# EAGLE board MainBoard (EAGLE 7.2.0)
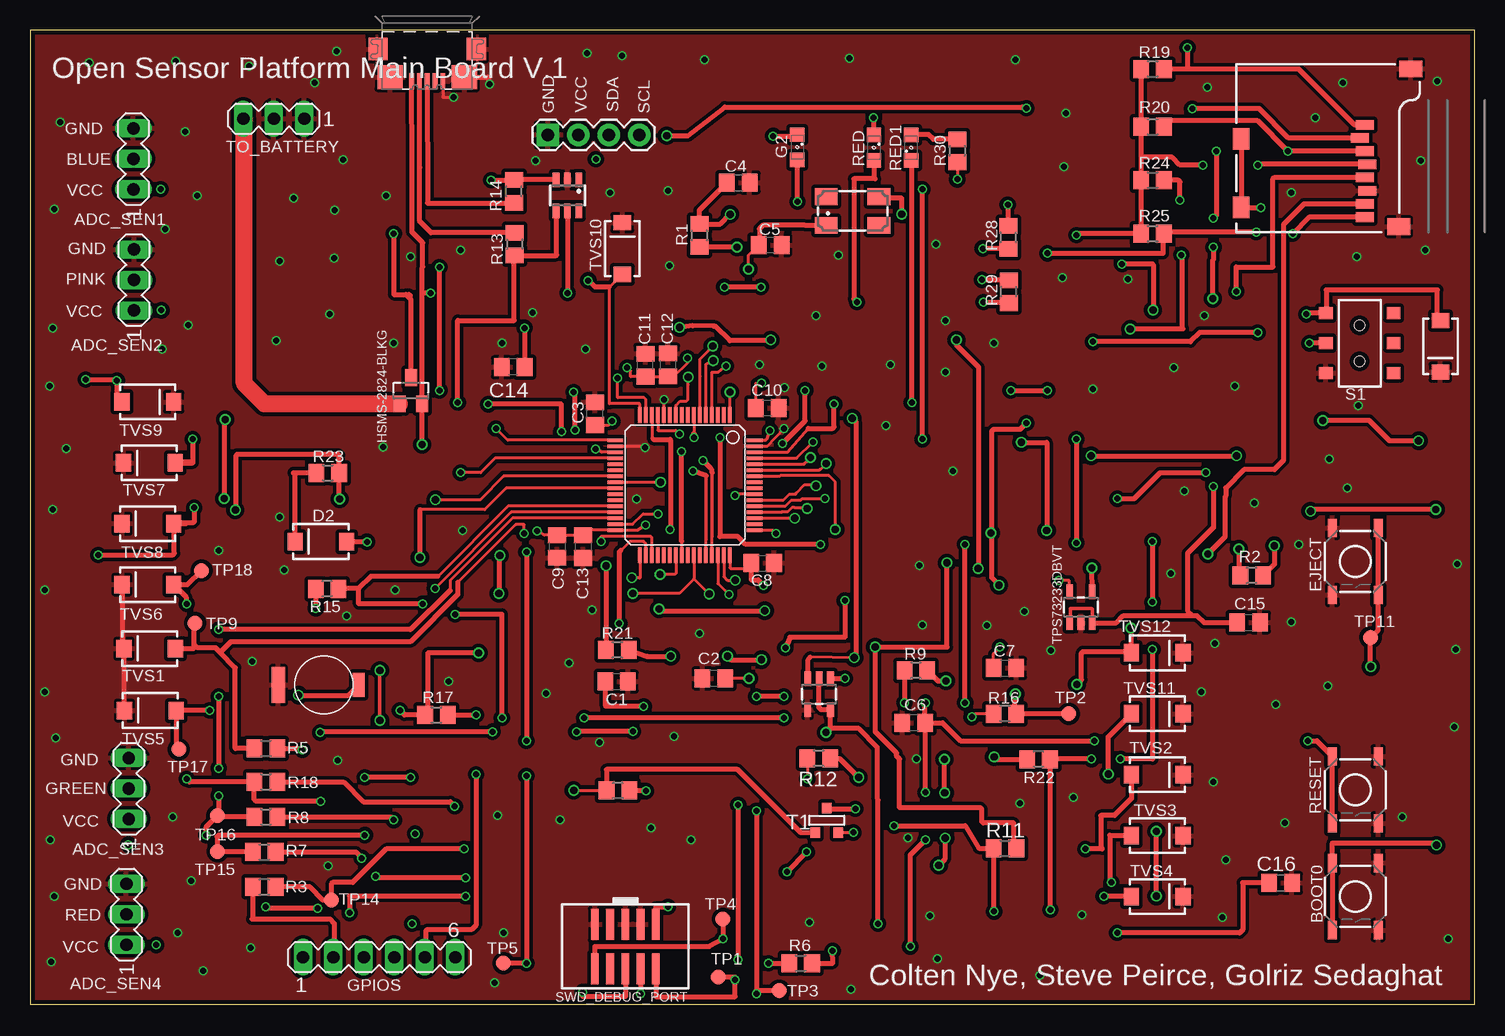
[diagram p0: board, top side]
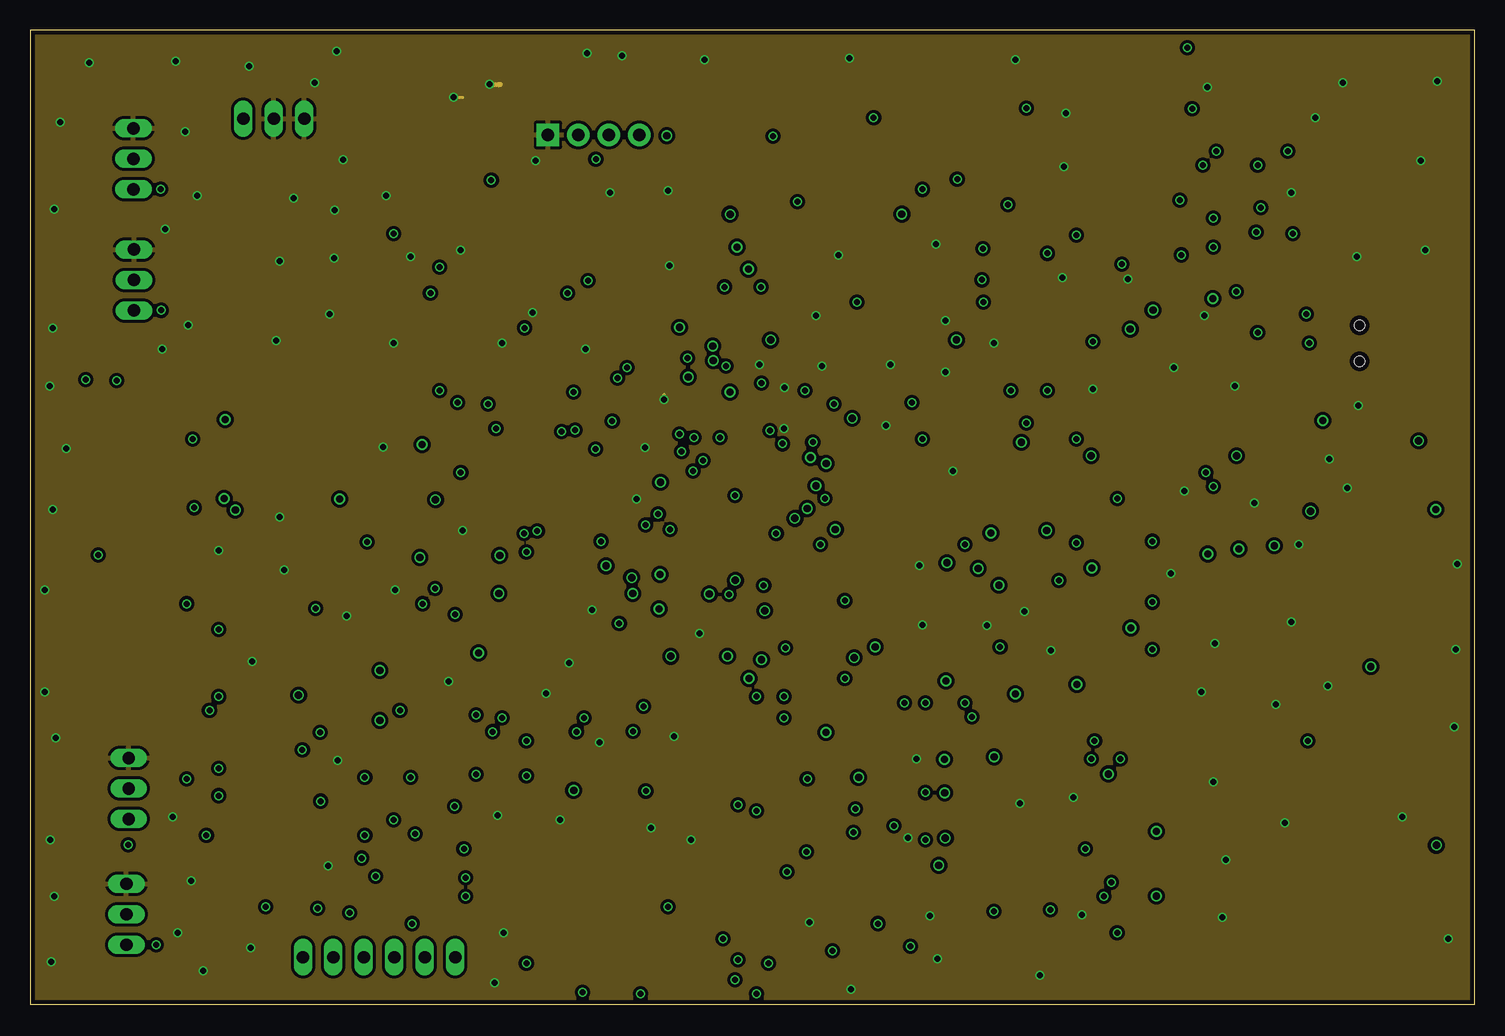
[diagram p1: board, inner layer GND]
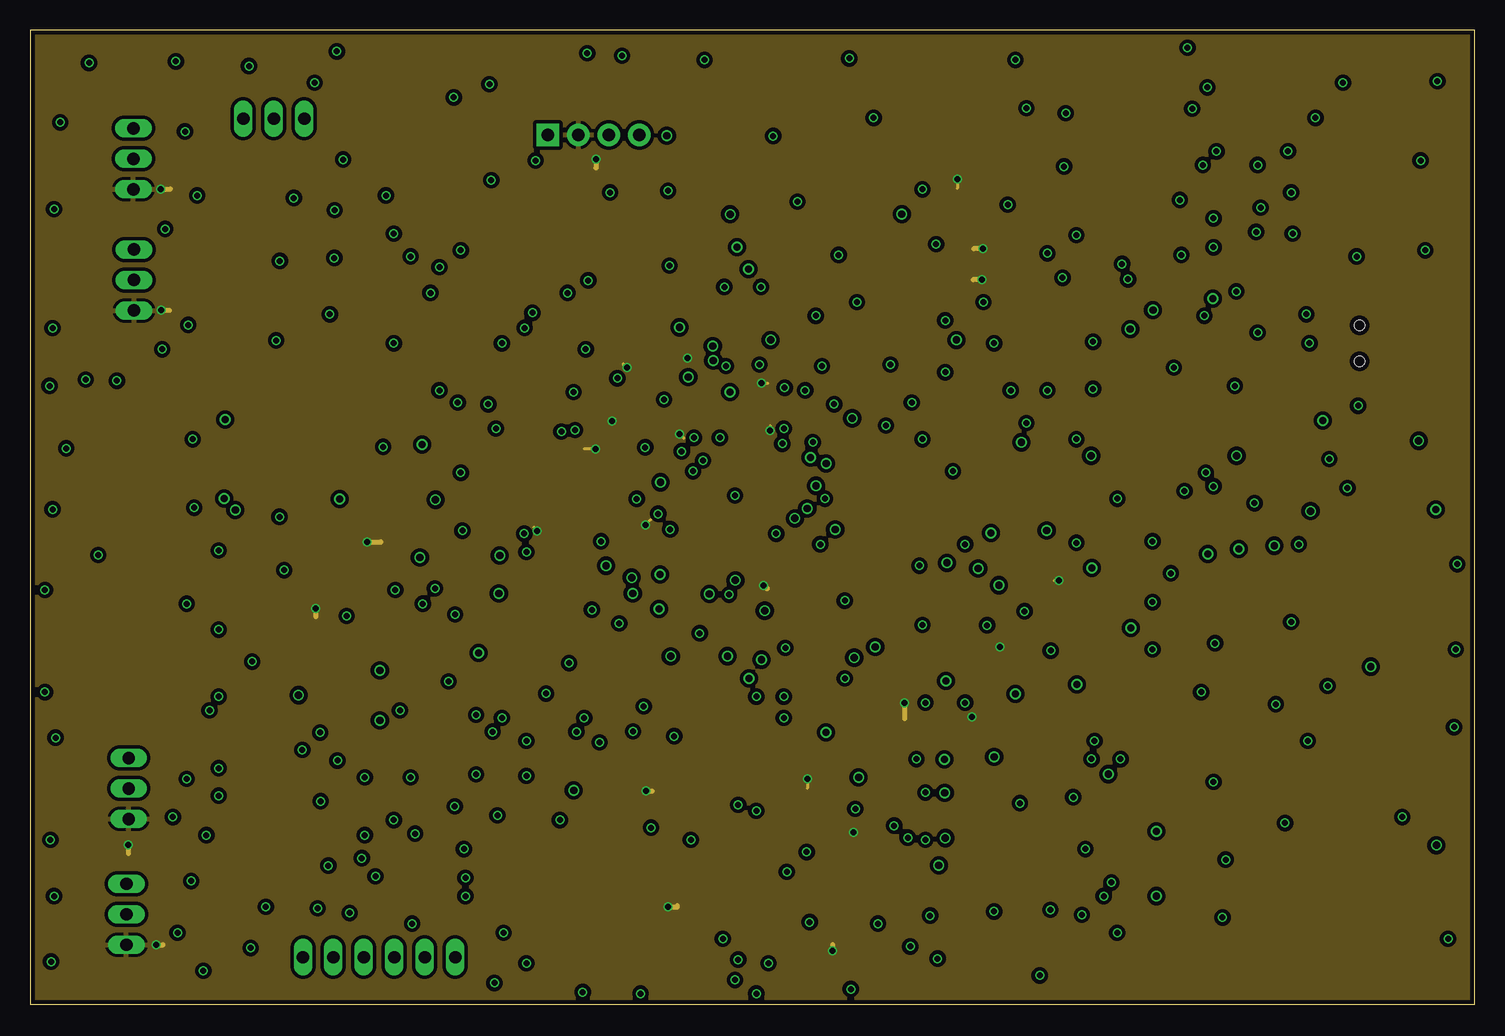
[diagram p2: board, inner layer +3V3]
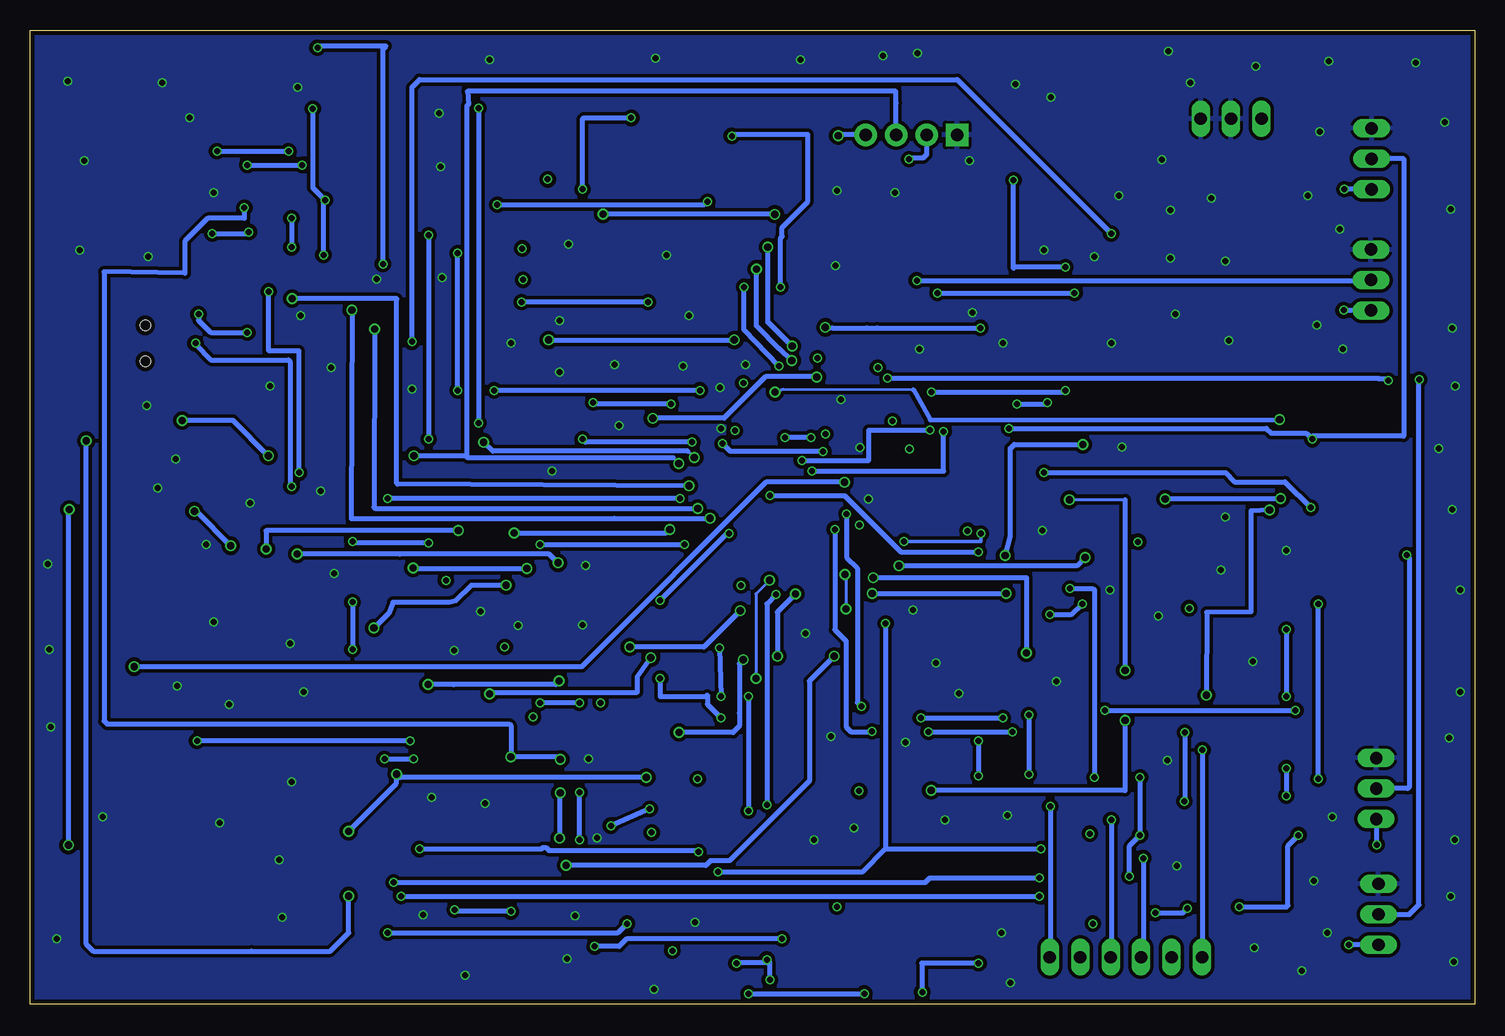
[diagram p3: board, bottom side, seen from below]

Size 120.45 x 81.23 mm. Coordinates in mm from the lower left corner, seen from the top.
Outline: 0,0 120.45,0.01 120.45,81.23 0.01,81.22 0,0
Copper layers (1*2*15*16): Top 0.035559375mm / dielectric 0.17018125mm / GND 0.01778125mm / dielectric 47mil / +3V3 0.01778125mm / dielectric 0.17018125mm / Bottom 0.035559375mm
Design rules "OSHPark-4layer": minimum track width 5mil, minimum drill 10mil, track to track 5mil, track to pad 5mil, pad to pad 5mil, via to via 5mil, smd to smd 5mil, copper to edge 15mil, drill to drill 6mil, minimum pad ring 4mil, minimum via ring 4mil, stop-mask expansion 4mil, vias tented up to drill 0mil, thermal gap 10mil

## Footprints (pad centres in the part's own frame; a part is rotated, then mirrored left to right if it is on the bottom)
CTS406 = smd 1.9 x 1.4: 1 -2.2,-1.2; 2 2.2,-1.2; 3 2.2,1.2; 4 -2.2,1.2
MA03-1 = drill 1.016 long: 1 -2.54,0; 2 0,0; 3 2.54,0
TACTILE-SWITCH-SMD = smd 1.524 x 0.762: 1 -2.794,1.905; 2 2.794,1.905; 3 -2.794,-1.905; 4 2.794,-1.905
C0805 = smd 1.3 x 1.5: 1 -0.95,0; 2 0.95,0
SOT23-5 = smd 0.55 x 1.2: 1 -0.95,-1.3; 2 0,-1.3; 3 0.95,-1.3; 4 0.95,1.3; 5 -0.95,1.3
SMA-DIODE = smd 1.27 x 1.47: A -2.15,0; C 2.15,0
SML0805 = smd 1.2 x 1.2: A 1.05,0; C -1.05,0
MA06-1 = drill 1.016 long: 1 -6.35,0; 2 -3.81,0; 3 -1.27,0; 4 1.27,0; 5 3.81,0; 6 6.35,0
SOT23 = smd 1 x 1.4: 1 -0.95,-1.1; 2 0.95,-1.1; 3 0,1.1
1X04 = drill 1.016 pad 1.88 square: 1 0,0 | drill 1.016 pad 1.88: 2 2.54,0; 3 5.08,0; 4 7.62,0
R0805 = smd 1.3 x 1.5: 1 -0.95,0; 2 0.95,0
SOT23-6 = smd 0.55 x 1.2: 1 -0.95,-1.3; 2 0,-1.3; 3 0.95,-1.3; 4 0.95,1.3; 5 0,1.3; 6 -0.95,1.3
AYZ0202 = smd 1 x 1.15: 1 -2.5,2.825; 2 0,2.825; 3 2.5,2.825; 4 -2.5,-2.825; 5 0,-2.825; 6 2.5,-2.825 | hole 0.85: 1.5,0; -1.5,0
414-VA5R = smd 1 x 2: + -2.9,0 | smd 1.1 x 3: - 3.8,0
2X05_1.27MM_SMT = smd 0.65 x 2.6: 1 -2.54,-1.85; 2 -2.54,1.85; 3 -1.27,-1.85; 4 -1.27,1.85; 5 0,-1.85; 6 0,1.85; 7 1.27,-1.85; 8 1.27,1.85; 9 2.54,-1.85; 10 2.54,1.85
SOT-23 = smd 0.787 x 0.889: 1 0.025,-1.016; 2 -0.94,1.016; 3 0.991,1.016
B1,27 = smd 1.27 x 1.27: TP 0,0
LQFP64 = smd 1.3 x 0.3: 1 -5.85,3.75; 2 -5.85,3.25; 3 -5.85,2.75; 4 -5.85,2.25; 5 -5.85,1.75; 6 -5.85,1.25; 7 -5.85,0.75; 8 -5.85,0.25; 9 -5.85,-0.25; 10 -5.85,-0.75; 11 -5.85,-1.25; 12 -5.85,-1.75; 13 -5.85,-2.25; 14 -5.85,-2.75; 15 -5.85,-3.25; 16 -5.85,-3.75; 33 5.85,-3.75; 34 5.85,-3.25; 35 5.85,-2.75; 36 5.85,-2.25; 37 5.85,-1.75; 38 5.85,-1.25; 39 5.85,-0.75; 40 5.85,-0.25; 41 5.85,0.25; 42 5.85,0.75; 43 5.85,1.25; 44 5.85,1.75; 45 5.85,2.25; 46 5.85,2.75; 47 5.85,3.25; 48 5.85,3.75 | smd 0.3 x 1.3: 17 -3.75,-5.8; 18 -3.25,-5.8; 19 -2.75,-5.8; 20 -2.25,-5.8; 21 -1.75,-5.8; 22 -1.25,-5.8; 23 -0.75,-5.8; 24 -0.25,-5.8; 25 0.25,-5.8; 26 0.75,-5.8; 27 1.25,-5.8; 28 1.75,-5.8; 29 2.25,-5.8; 30 2.75,-5.8; 31 3.25,-5.8; 32 3.75,-5.8; 49 3.75,5.8; 50 3.25,5.8; 51 2.75,5.8; 52 2.25,5.8; 53 1.75,5.8; 54 1.25,5.8; 55 0.75,5.8; 56 0.25,5.8; 57 -0.25,5.8; 58 -0.75,5.8; 59 -1.25,5.8; 60 -1.75,5.8; 61 -2.25,5.8; 62 -2.75,5.8; 63 -3.25,5.8; 64 -3.75,5.8
MICRO-SD-SOCKET-PP = smd 0.8 x 1.5: 1 -8.94,10.7; 2 -7.84,10.3; 3 -6.74,10.7; 4 -5.64,10.9; 5 -4.54,10.7; 6 -3.44,10.9; 7 -2.34,10.7; 8 -1.24,10.7 | smd 1.8 x 1.4: CD1 -2.05,0.4; CD2 -7.75,0.4 | smd 1.4 x 1.9: GND1 -13.6,14.55; GND3 -0.45,13.55
ZX62R-B-5P = smd 1.35 x 0.4: 1 2.675,-1.3; 2 2.675,-0.65; 3 2.675,0; 4 2.675,0.65; 5 2.675,1.3 | smd 1.9 x 1.6: M1 0,-4.1; M2 0,4.1 | smd 2 x 2.1: M3 2.35,3.1; M4 2.35,-3.1

## Placement (x,y rotation side)
406C35E  16meg  [CTS406]  68.57,66.13 0 top
ADC_SEN1  [MA03-1]  8.62,70.48 90 top
ADC_SEN2  [MA03-1]  8.67,60.39 90 top
ADC_SEN3  [MA03-1]  8.23,17.98 90 top
ADC_SEN4  [MA03-1]  8.04,7.49 90 top
BOOT0  Boot0  [TACTILE-SWITCH-SMD]  110.48,8.98 270 top
C1  2.2u  [C0805]  48.9,26.91 0 top
C2  2.2u  [C0805]  57.01,27.18 180 top
C3  100n  [C0805]  47.1,49.24 90 top
C4  22p  [C0805]  59.05,68.5 0 top
C5  22p  [C0805]  61.71,63.31 0 top
C6  0.1u  [C0805]  73.67,23.46 180 top
C7  10u  [C0805]  81.27,28.03 0 top
C8  100n  [C0805]  61.07,36.77 0 top
C9  100n  [C0805]  43.93,38.17 270 top
C10  100n  [C0805]  61.46,49.73 0 top
C11  100n  [C0805]  51.3,53.28 90 top
C12  1u  [C0805]  53.2,53.3 90 top
C13  10u  [C0805]  46.09,38.16 270 top
C14  0.01u  [C0805]  40.28,53.12 180 top
C15  1u  [C0805]  101.59,31.84 0 top
C16  4.7u  [C0805]  104.26,10.12 0 top
CURRENT_LIMITER  STMPS2141STR  [SOT23-5]  65.78,25.85 180 top
D2  [SMA-DIODE]  24.25,38.57 180 top
EJECT  Eject  [TACTILE-SWITCH-SMD]  110.48,36.92 270 top
G2  [SML0805]  63.97,71.45 270 top
GPIOS  [MA06-1]  29.1,3.93 0 top
HSMS-2824-BLKG  Schottky  [SOT23]  31.75,51.16 0 top
JP1  I2C Sensor  [1X04]  43.17,72.48 0 top
R1  904.3  [R0805]  55.8,64.1 270 top
R2  10k  [R0805]  101.84,35.75 180 top
R3  10k  [R0805]  19.53,9.77 180 top
R5  10k  [R0805]  19.66,21.33 0 top
R6  100k  [R0805]  64.24,3.42 0 top
R7  10k  [R0805]  19.53,12.69 0 top
R8  10k  [R0805]  19.66,15.62 0 top
R9  4.7k  [R0805]  73.85,27.84 180 top
R10  10k  [R0805]  49.01,17.82 180 top
R11  47k  [R0805]  81.28,13.01 0 top
R12  4.7k  [R0805]  65.75,20.49 180 top
R13  22  [R0805]  40.4,63.38 270 top
R14  22  [R0805]  40.34,67.77 90 top
R15  10k  [R0805]  24.77,34.64 180 top
R16  47k  [R0805]  81.27,24.22 180 top
R17  10k  [R0805]  33.88,24.12 0 top
R18  10k  [R0805]  19.66,18.54 0 top
R19  47k  [R0805]  93.57,77.97 0 top
R20  47k  [R0805]  93.57,73.15 0 top
R21  0  [R0805]  48.96,29.54 180 top
R22  47k  [R0805]  84.07,20.43 180 top
R23  1k  [R0805]  24.82,44.3 0 top
R24  47k  [R0805]  93.57,68.7 0 top
R25  47k  [R0805]  93.57,64.26 0 top
R28  1k  [R0805]  81.56,63.93 90 top
R29  1k  [R0805]  81.59,59.41 90 top
R30  1k  [R0805]  77.3,71.16 270 top
RCLAMP0504S  [SOT23-6]  44.81,67.43 180 top
RED  [SML0805]  70.36,71.41 270 top
RED1  [SML0805]  73.44,71.42 90 top
RESET  reset  [TACTILE-SWITCH-SMD]  110.48,17.87 270 top
S1  [AYZ0202]  110.85,55.11 90 top
SUPERCAP  [414-VA5R]  24.5,26.62 180 top
SWD_DEBUG_PORT  [2X05_1.27MM_SMT]  49.63,4.82 180 top
T1  NDS352AP  [SOT-23]  66.44,15.33 180 top
TO_BATTERY  [MA03-1]  20.33,73.83 180 top
TP1  TPB1,27  [B1,27]  57.38,2.28 0 top
TP2  TPB1,27  [B1,27]  86.6,24.22 0 top
TP3  TPB1,27  [B1,27]  62.46,1.14 0 top
TP4  TPB1,27  [B1,27]  57.76,7.11 0 top
TP5  TPB1,27  [B1,27]  39.47,3.42 0 top
TP9  TPB1,27  [B1,27]  13.76,31.79 180 top
TP11  TPB1,27  [B1,27]  111.75,30.57 0 top
TP14  TPB1,27  [B1,27]  25.14,8.68 0 top
TP15  TPB1,27  [B1,27]  15.63,12.73 0 top
TP16  TPB1,27  [B1,27]  15.61,15.71 0 top
TP17  TPB1,27  [B1,27]  12.41,21.27 0 top
TP18  TPB1,27  [B1,27]  14.29,36.16 0 top
TPS73233DBVT  3.3V  [SOT23-5]  87.6,33.11 0 top
TVS1  TVS  [SMA-DIODE]  9.98,29.65 180 top
TVS2  TVS  [SMA-DIODE]  93.97,19.14 0 top
TVS3  TVS  [SMA-DIODE]  93.97,14.06 0 top
TVS4  TVS  [SMA-DIODE]  93.97,8.98 0 top
TVS5  TVS  [SMA-DIODE]  10.03,24.49 180 top
TVS6  TVS  [SMA-DIODE]  9.82,34.99 180 top
TVS7  TVS  [SMA-DIODE]  9.94,45.15 180 top
TVS8  TVS  [SMA-DIODE]  9.82,40.07 180 top
TVS9  TVS  [SMA-DIODE]  9.82,50.23 0 top
TVS10  TVS  [SMA-DIODE]  49.38,63.01 90 top
TVS11  TVS  [SMA-DIODE]  93.97,24.22 0 top
TVS12  P4SMA  [SMA-DIODE]  93.97,29.3 0 top
TVS13  TVS  [SMA-DIODE]  117.58,54.86 270 top
U1  STM32F20XR  [LQFP64]  54.6,43.27 270 top
U2  MicroSDCard  [MICRO-SD-SOCKET-PP]  100.56,64.38 270 top
USB_FS  MICRO-USB-SHIELD-ZX62R-B-5P  [ZX62R-B-5P]  33.11,79.64 270 top

## Library data of the parts
406C35E = crystal; OC_FARNELL: unknown; OC_NEWARK: unknown
ADC_SEN1-ADC_SEN4 GPIOS TO_BATTERY = con-lstb; OC_FARNELL: unknown; OC_NEWARK: unknown
BOOT0 EJECT RESET = SparkFun-Electromechanical; PROD_ID: SWCH-08247
C1-C16 R1-R3 R5-R25 R28-R30 = rcl
CURRENT_LIMITER = SparkFun-PowerIC
D2 TVS1-TVS13 = SparkFun-DiscreteSemi
G2 RED RED1 = led
HSMS-2824-BLKG = diode
JP1 U2 = SparkFun-Connectors
RCLAMP0504S SWD_DEBUG_PORT = microbuilder
S1 = SparkFun-Electromechanical; PROD_ID: SWCH-08179
SUPERCAP = adafruit
T1 = zetex; OC_FARNELL: unknown; OC_NEWARK: unknown
TP1-TP5 TP9 TP11 TP14-TP18 = testpad
TPS73233DBVT = SparkFun-PowerIC; PROD_ID: VREG-00822
U1 = stm32F
USB_FS = con-hirose

## Nets
+3V3: ADC_SEN1.1 ADC_SEN2.1 ADC_SEN3.1 ADC_SEN4.1 C3.1 C7.1 C8.1 C9.1 C10.1 C11.1 C12.1 C13.1 D2.A JP1.2 R6.2 R9.2 R10.1 R12.2 R15.2 R16.2 R28.1 R29.2 R30.2 SWD_DEBUG_PORT.1 T1.2 TPS73233DBVT.5 U1.13 U1.19 U1.32 U1.48 U1.64
ADC1_IN0: R18.1 TP18.TP TVS6.A U1.14
BLUE: ADC_SEN1.2 TVS7.A U1.17
BOOT0: R2.2 U1.60
DEBUG_LED/NP1: GPIOS.1 R5.2
DEBUG_LED/NP2: GPIOS.2 R3.2
DEBUG_LED/NP3: GPIOS.3 R7.2
DEBUG_LED/NP4: GPIOS.4 R8.2
DEBUG_LED/NP5: GPIOS.5 R17.2
DEBUG_LED/NP6: GPIOS.6 R18.2
DM_IN/FS: R13.1 USB_FS.2
DM_OUT/FS: R13.2 RCLAMP0504S.4 U1.44
DP_IN/FS: R14.1 USB_FS.3
DP_OUT/FS: R14.2 RCLAMP0504S.3 U1.45
GND: ADC_SEN1.3 ADC_SEN2.3 ADC_SEN3.3 ADC_SEN4.3 BOOT0.1 BOOT0.2 C1.2 C2.2 C3.2 C4.2 C5.2 C6.2 C7.2 C8.2 C9.2 C10.2 C11.2 C12.2 C13.2 C14.2 C15.2 C16.2 CURRENT_LIMITER.4 EJECT.3 EJECT.4 JP1.1 RCLAMP0504S.2 RESET.1 RESET.2 S1.1 SUPERCAP.- SWD_DEBUG_PORT.3 SWD_DEBUG_PORT.5 SWD_DEBUG_PORT.9 TO_BATTERY.1 TO_BATTERY.2 TPS73233DBVT.2 TVS1.C TVS2.C TVS3.C TVS4.C TVS5.C TVS6.C TVS7.C TVS8.C TVS9.C TVS10.C TVS11.C TVS12.C TVS13.C U1.12 U1.18 U1.63 U2.6 U2.GND1 U2.GND3 USB_FS.5 USB_FS.M1 USB_FS.M2 USB_FS.M3 USB_FS.M4
GPIO1: R5.1 TP9.TP TVS1.A U1.35
GPIO2: R3.1 TP14.TP TVS2.A U1.34
GPIO3: R7.1 TP15.TP TVS3.A U1.29
GPIO4: R8.1 TP16.TP TVS4.A U1.30
GPIO5: R17.1 TP17.TP TVS5.A U1.33
GREEN: ADC_SEN3.2 TVS8.A U1.20
I2C1_SCL: JP1.4 R9.1 TVS12.A U1.58
I2C1_SDA: JP1.3 R12.1 TVS11.A U1.59
N$1: C1.1 U1.31
N$2: C2.1 U1.47
N$3: G2.C U1.4
N$4: HSMS-2824-BLKG.1 TO_BATTERY.3
N$5: 406C35E.3 C4.1 R1.1
N$6: BOOT0.3 BOOT0.4 R2.1
N$9: R1.2 U1.6
N$10: C14.1 TPS73233DBVT.4
N$13: RED1.C U1.62
N$14: R21.1 R22.2 U2.CD1 U2.CD2
N$15: D2.C R23.1
N$16: R29.1 RED.A
N$17: G2.A R28.2
N$18: R30.1 RED1.A
N$20: RED.C U1.61
N$21: HSMS-2824-BLKG.3 S1.3 TVS13.A
N$26: R11.1 R19.1 R20.1 R22.1 R24.1 R25.1 T1.1 U2.4
OSC_IN: 406C35E.1 C5.1 U1.5
PINK: ADC_SEN2.2 TVS10.A U1.16
RED: ADC_SEN4.2 TVS9.A U1.15
RESET: C6.1 RESET.3 RESET.4 SWD_DEBUG_PORT.10 TP4.TP U1.7
SD_DETECT: R21.2 U1.25
SD_EJECT: EJECT.1 EJECT.2 TP11.TP U1.24
SD_PWR_EN: R10.2 T1.3 U1.23
SDIO_CK: U1.53 U2.5
SDIO_CMD: R20.2 U1.54 U2.3
SDIO_D0: R11.2 U1.39 U2.7
SDIO_D1: R25.2 U1.40 U2.8
SDIO_D2: R19.2 U1.51 U2.1
SDIO_D3: R24.2 U1.52 U2.2
SWCK: SWD_DEBUG_PORT.4 TP3.TP U1.49
SWDIO: R6.1 SWD_DEBUG_PORT.2 TP1.TP U1.46
TRACESWO: SWD_DEBUG_PORT.6 TP5.TP U1.55
USB/FS_OVERCURRENT: CURRENT_LIMITER.3 R16.1 TP2.TP U1.10
USB/FS_POWERSWITCHON: CURRENT_LIMITER.1 R15.1 U1.28
VBAT: R23.2 SUPERCAP.+ U1.1
VBUS/FS: C16.1 CURRENT_LIMITER.2 CURRENT_LIMITER.5 HSMS-2824-BLKG.2 RCLAMP0504S.5 U1.42 USB_FS.1
VIN: C15.1 S1.2 TPS73233DBVT.1 TPS73233DBVT.3

## Tracks (layer width: path | path; a pad name or v marks a point on that pad's centre or on a via)
+3V3  (via drill 0.5 pad 0.25)
  Top 0.254: TPS73233DBVT.5 86.64,34.41 86.64,35.33 v85.78,35.33 | C7.1 80.32,29.21 80.34,29.23 80.34,29.26 v80.87,29.79 | R16.2 78.79,24.22 v78.51,23.95 | T1.2 68.22,14.32 v68.63,14.32 | R12.2 64.8,19.12 v64.8,18.79 | U1.19 47.65,46.02 47.5,46.17 v47.14,46.3 | C3.1 48.22,48.29 v48.54,48.61 | C10.1 60.51,51.76 60.53,51.79 v60.99,51.79 | U1.48 58.35,36.39 58.39,36.34 59.69,36.34 C8.1 | v51.31,39.95 50.65,39.52 U1.32 46.51,39.52 C13.1 46.08,39.12 C9.1 42.87,39.12 v42.29,39.47 | U1.13 52.35,47.85 | 52.35,47.85 | 52.35,47.85 53.82,47.85 v54.15,47.54 | v49.78,53.08 50.06,52.8 50.06,52.34 50.08,52.33 C11.1 53.18,52.33 C12.1 53.71,52.35 54.81,53.46 v54.81,53.87 | R30.2 77.3,69.06 v77.29,68.78 | U1.64 61.33,47.02 61.47,47.16 61.47,47.19 v61.7,47.82
  Top 0.406: R10.1 51.29,17.82 v51.33,17.77 | R6.2 66.93,3.42 v66.9,4.46 | D2.A 28.07,38.57 v28.09,38.55 | R15.2 v23.82,33.02 v23.83,33.01 | R29.2 79.39,60.36 v79.35,60.4 | R28.1 79.46,62.98 v79.43,63.01 | R9.2 72.9,26.14 v72.9,25.14 | C8.1 60.12,35.38 60.71,35.38 v61.16,34.92 | SWD_DEBUG_PORT.1 52.17,8.12 v53.19,8.12
  +3V3 0.254: v85.78,35.33 85.37,35.33 | v80.87,29.79 80.9,29.79 81.1,29.99 | v78.51,23.95 78.46,23.9 | v68.63,14.32 68.81,14.32 68.83,14.29 | v64.8,18.79 64.8,18.03 | v47.14,46.3 46.23,46.3 | v48.54,48.61 48.74,48.81 | v60.99,51.79 61.49,51.79 | v51.31,39.95 51.74,40.41 | v42.29,39.47 41.99,39.77 | v54.15,47.54 54.51,47.19 | v49.78,53.08 49.76,53.08 49.45,53.39 | v54.81,53.87 54.81,54.1 | v77.29,68.78 77.29,68.04 | v61.7,47.82 61.72,48.23
  +3V3 0.406: v51.33,17.77 51.89,17.77 | v66.9,4.46 66.93,4.97 | v28.09,38.55 29.24,38.55 29.26,38.53 | v23.83,33.01 23.83,32.33 | v79.35,60.4 78.61,60.4 | v79.43,63.01 78.69,63.01 78.66,62.99 | v72.9,25.14 72.9,23.79 | v61.16,34.92 61.19,34.92 61.47,34.64 | v10.95,57.86 11.61,57.86 | v10.9,67.96 11.71,67.96 | v8.2,13.3 8.2,12.57 | v10.52,4.95 11.07,4.95 11.1,4.97 | v47.17,70.45 47.17,69.74 47.19,69.72 | v53.19,8.12 53.95,8.12 53.95,8.25
  Bottom 0.406: ADC_SEN2.1 v10.94,57.85 v10.95,57.86 | ADC_SEN1.1 10.87,67.94 v10.9,67.96 | ADC_SEN3.1 8.23,13.33 v8.2,13.3 | ADC_SEN4.1 v10.51,4.95 v10.52,4.95 | JP1.2 45.71,70.85 46,70.56 47.07,70.56 v47.17,70.45
  pour +3V3 (isolate 0.305): -0.03,81.15 120.62,81.15 120.62,-0.13 -0.03,-0.13
ADC1_IN0  (via drill 0.5 pad 0.25)
  Top 0.254: U1.14 51.85,47.2 51.97,47.09
  Top 0.406: TP18.TP 13.12,34.99 TVS6.A 13.06,33.9 v13.06,33.4 | v13.06,18.79 13.31,18.54 R18.1 18.67,18.5 18.67,17.09 18.82,16.94 v24.23,16.94 | 51.97,47.09 53.37,47.09 53.39,47.06 53.39,46.98 53.42,46.96 53.42,39.64 v53.37,39.59 | v50.27,22.75 45.57,22.75 v45.54,22.73 | v38.56,22.73 24.26,22.73 v24.18,22.65
  Bottom 0.406: v13.06,18.79 v13.06,33.4 | v53.37,39.59 53.37,31.21 52.43,30.27 52.43,23.13 52.02,22.73 50.29,22.73 v50.27,22.75 | v45.54,22.73 v38.56,22.73 | v24.18,22.65 24.18,16.99 v24.23,16.94
BLUE  (via drill 0.5 pad 0.25)
  Top 0.254: U1.17 39.82,47.02 v38.84,48
  Top 0.406: v13.56,47.11 13.56,45.71 13.56,45.21 | 13.56,45.21 12.15,45.21 | TVS7.A 13.56,45.15 13.56,45.21
  Bottom 0.406: v38.84,48 17.37,48 16.99,47.62 14.07,47.62 v13.56,47.11 13.56,47.37 5.94,47.37 5.94,70.48 ADC_SEN1.2
BOOT0  (via drill 0.6)
  Top 0.254: U1.60 64.53,45.02 64.81,45.31 64.81,45.33 v65.07,45.59
  Top 0.406: v82.64,46.85 84.75,46.85 v84.75,39.5 | v100.77,37.95 100.77,35.87 R2.2
  Bottom 0.254: v65.07,45.59 65.1,45.59 65.62,46.11
  Bottom 0.406: 65.62,46.11 81.89,46.11 v82.64,46.85 | v84.75,39.5 100.77,39.5 v100.77,37.95
DEBUG_LED/NP1  (via drill 0.5 pad 0.25)
  Top 0.406: R5.2 22.58,21.33 v22.71,21.2
  Bottom 0.406: v22.71,21.2 22.71,3.97 GPIOS.1
DEBUG_LED/NP2
  Top 0.406: R3.2 18.58,7.17 18.52,7.11 24.99,7.11 25.37,6.73 25.37,4.01 GPIOS.2
DEBUG_LED/NP3  (via drill 0.5 pad 0.25)
  Top 0.406: R7.2 27.15,12.69 v27.66,12.19
  Bottom 0.406: v27.66,12.19 27.66,4.1 GPIOS.3
DEBUG_LED/NP4  (via drill 0.5 pad 0.25)
  Top 0.406: R8.2 30.07,15.62 v30.33,15.36
  Bottom 0.406: v30.33,15.36 30.33,3.97 GPIOS.4
DEBUG_LED/NP5  (via drill 0.5 pad 0.25)
  Top 0.406: R17.2 v37.19,24.12 | v37.19,19.17 37.19,6.6 36.8,6.22 33.12,6.22 32.99,6.09 32.99,4.01 GPIOS.5
  Bottom 0.406: v37.19,24.12 v37.19,19.17
DEBUG_LED/NP6  (via drill 0.5 pad 0.25)
  Top 0.406: R18.2 26.14,18.54 27.79,16.89 35.03,16.89 v35.41,16.5
  Bottom 0.406: v35.41,16.5 35.41,3.97 GPIOS.6
DM_IN/FS
  Top 0.406: R13.1 33.43,64.33 32.49,65.27 32.49,69.78 USB_FS.2
DM_OUT/FS  (via drill 0.5 pad 0.25)
  Top 0.254: U1.44 56.35,38.72 56.36,38.73
  Top 0.305: 56.36,38.73 56.36,44.06
  Top 0.406: 56.36,44.06 v55.27,44.44 | v44.3,47.75 44.3,50.03 v38.2,50.03 | v35.66,50.16 35.66,57.02 40.36,57.02 40.36,62.39 R13.2 43.87,62.43 43.92,62.48 43.92,66.07 RCLAMP0504S.4
  Bottom 0.406: v55.27,44.44 44.3,44.44 v44.3,47.75 | v38.2,50.03 35.79,50.03 v35.66,50.16
DP_IN/FS
  Top 0.406: USB_FS.3 33.16,66.83 33.12,66.8 40.31,66.8 R14.1
DP_OUT/FS  (via drill 0.5 pad 0.25)
  Top 0.254: U1.45 56.85,38.96 56.87,38.98
  Top 0.305: 56.87,38.98 56.87,44.32
  Top 0.406: 56.87,44.32 56.85,44.55 56.74,44.7 v56.11,45.33 | v45.44,47.87 45.44,50.92 v45.31,51.05 | v34.14,51.18 v34.14,61.46 | v38.46,68.7 40.32,68.7 R14.2 RCLAMP0504S.3
  Bottom 0.406: v56.11,45.33 50.52,45.33 50.52,47.87 v45.44,47.87 | v45.31,51.05 34.26,51.05 v34.14,51.18 | v34.14,61.46 38.33,61.46 38.46,61.34 v38.46,68.7
GND  (via drill 0.5, 0.5 pad 0.25)
  Top 0.254: U1.18 50.29,46.52 50.29,46.53 51.18,46.53 v51.28,46.43 | U1.12 52.85,50.41 v52.86,50.41 | U1.63 61.46,46.52 v62.84,48 | USB_FS.5 34.42,75.67 34.42,75.61 v35.33,75.61
  Top 0.406: 36.24,77.61 USB_FS.M3 38.18,77.29 v38.3,76.7 | TVS6.C 7.67,29.81 TVS1.C 7.83,24.54 TVS5.C | 50.11,27.18 C1.2
  GND 0.254: v51.28,46.43 51.31,46.43 51.41,46.32 | v52.86,50.41 52.86,50.85 | v62.84,48 62.69,47.87 62.76,47.95 | v35.33,75.61 36.07,75.61
  GND 0.406: v38.3,76.7 39.07,76.68 39.22,76.7
  other vias: 22,67.23 20.83,61.97 25.37,62.22 24.99,57.53 20.52,55.34 13.18,56.64 1.88,56.38 1.63,51.56 3.02,46.35 1.88,41.27 1.24,34.54 1.24,26.03 2.13,22.22 1.7,13.71 18.52,28.57 15.72,37.84 21.18,36.19 34.9,26.92 44.93,28.44 43.03,25.9 46.84,32.89 26.39,32.38 36.04,39.49 30.45,34.54 29.44,46.48 56.24,78.73 68.3,78.86 48.36,67.69 53.19,67.81 53.31,61.59 86.21,69.84 82.14,78.73 86.08,60.57 88.62,51.3 71.35,48.25 65.51,57.4 95.35,53.08 100.43,51.56 97.89,57.4 110.59,62.35 116.31,62.86 115.93,70.35 110.72,49.91 108.31,45.46 109.83,43.05 118.97,36.7 118.85,29.59 118.72,23.11 103.86,25.01 98.78,30.09 97.64,26.03 82.91,32.76 79.78,31.59 74.4,31.62 74.14,36.57 99.67,12.06 104.62,15.11 98.65,18.54 99.42,7.23 118.21,5.46 114.4,15.62 108.18,26.54 87.68,7.46 84.18,2.41 75.03,7.39 68.43,1.26 65,6.85 75.67,3.8 73.18,13.89 55.09,13.71 51.77,14.73 44.17,15.36 38.96,15.74 38.71,1.77 39.47,5.96 2.01,66.29 11.28,64.64 13.94,67.43 12.93,72.77 2.51,73.53 4.93,78.48 12.17,78.61 18.26,78.23 23.72,76.83 25.58,79.45 49.35,79.09 42.14,70.35 86.33,74.29 91.54,60.45 105.13,67.69 107.16,73.91 109.45,76.83 117.32,76.96 76.3,52.7 71.73,53.33 76.94,44.44 105.13,31.87 67.41,62.48 75.54,63.37 66.01,53.21 60.81,53.33 41.88,57.65 20.8,40.63 98.15,76.45 18.39,4.69 14.45,2.79 12.29,5.96 1.75,3.55 2.01,9.01 11.91,15.62 13.44,10.28 26.11,70.43 35.92,62.86 31.72,62.35 11.02,54.6 86.97,17.27 73.89,20.44 105.77,38.35 55.83,30.93 53.7,22.35 47.47,21.84 82.52,16.76 95.1,35.94 96.24,42.79 102.08,41.78 76.3,57.02 80.37,55.11 25.63,20.31 24.87,11.55 85.09,29.48 30.33,55.11 39.34,55.11 29.67,67.43 46.33,54.6 50.57,42.13 25.4,66.21 46.46,79.29 62.92,51.4
  pour Bottom (isolate 0.305): -0.03,81.15 120.62,81.15 120.62,-0.13 -0.03,-0.13
  pour GND (isolate 0.254): -0.03,81.15 120.62,81.15 120.62,-0.13 -0.03,-0.13
  pour Top (isolate 0.305): -0.04,81.15 120.61,81.15 120.61,-0.13 -0.04,-0.13
GPIO1  (via drill 0.5 pad 0.25)
  Top 0.254: U1.35 51.85,38.92 51.79,38.98 47.6,38.98 v47.6,38.6 | v41.2,39.24 41.2,40 40.49,40 35.66,35.17
  Top 0.406: TVS1.A 13.62,29.65 13.69,29.71 13.69,29.97 | 13.69,29.97 13.69,31.71 TP9.TP | R5.1 17.12,21.33 17.12,28.06 15.85,29.33 | 15.85,29.33 15.47,29.71 13.94,29.71 13.69,29.97 | 35.66,35.17 35.66,34.16 31.72,30.22 16.74,30.22 15.85,29.33
  Bottom 0.305: v47.6,38.6 41.2,38.6 v41.2,39.24
GPIO2  (via drill 0.5 pad 0.25)
  Top 0.254: U1.34 51.35,38.41 51.16,38.6 50.01,38.6 49.25,37.84
  Top 0.406: 49.25,37.84 49.12,37.71 v49.12,31.74 | v36.17,12.95 29.69,12.95 26.9,10.15 25.25,10.15 25.12,10.03 25.12,8.7 TP14.TP 24.44,8.68 23.34,9.77 R3.1 | TVS2.A 91.82,17.16 90.4,15.74 89.26,15.74 89.26,13.08 89.38,12.95 v87.99,12.95 | v64.74,12.69 v63.09,11.04
  Bottom 0.406: v49.12,31.74 49.12,12.95 | 49.12,12.95 v36.17,12.95 | v87.99,12.95 77.83,12.95 77.7,13.08 77.44,13.08 77.19,12.82 64.87,12.82 v64.74,12.69 | v63.09,11.04 51.03,11.04 49.12,12.95
GPIO3  (via drill 0.5 pad 0.25)
  Top 0.254: U1.29 40.11,41.02 v33.76,34.67
  Top 0.406: v31.72,18.92 v27.91,18.92 | v27.91,14.09 15.72,14.09 15.6,13.96 15.6,12.77 TP15.TP 15.67,12.69 R7.1 | TVS3.A 90.05,14.06 90.02,14.09 90.02,10.28 v90.14,10.15 | v36.3,10.54 28.93,10.54 v28.8,10.66
  Bottom 0.406: v33.76,34.67 31.85,34.67 31.72,34.54 v31.72,18.92 | v27.91,18.92 v27.91,14.09 28.8,13.2 v28.8,10.66 | v90.14,10.15 45.82,10.15 45.44,10.54 v36.3,10.54
GPIO4  (via drill 0.5 pad 0.25)
  Top 0.254: U1.30 40.21,40.52 35.04,35.35 35.04,34.48 35.05,34.47
  Top 0.406: 35.04,34.48 34.97,34.48 31.72,31.24 v15.72,31.24 | v15.72,25.65 v15.72,19.68 | R8.1 15.7,15.62 TP16.TP | v15.72,17.39 15.72,15.83 TP16.TP | TVS4.A 89.54,8.98 v89.51,9.01 | v36.3,9.01 26.64,9.01 v26.64,7.61 | v23.98,8 19.79,8 v19.66,8.12 | v14.71,14.09 14.71,14.81 TP16.TP
  Bottom 0.406: v15.72,31.24 v15.72,25.65 | v15.72,19.68 v15.72,17.39 | v89.51,9.01 v36.3,9.01 | v26.64,7.61 24.36,7.61 v23.98,8 | v19.66,8.12 15.72,8.12 15.6,8.25 15.6,13.2 v14.71,14.09
GPIO5  (via drill 0.5 pad 0.25, 0.6)
  Top 0.254: U1.33 50.85,35.54 50.85,35.53 50.19,35.53 v50.16,35.57
  Top 0.406: v37.39,29.28 33.15,29.28 33.15,24.34 R17.1 31.22,24.12 v30.84,24.51 | TP17.TP 12.18,21.49 TVS5.A 12.2,24.51 v14.96,24.51
  Bottom 0.406: v50.16,35.57 37.37,35.57 v37.39,29.28 | v30.84,24.51 v14.96,24.51
GREEN  (via drill 0.5 pad 0.25)
  Top 0.254: U1.20 38.77,45.52 37.57,44.32 v35.92,44.32
  Top 0.406: v13.69,41.4 13.69,40.25 13.56,40.13 13,40.13 | 13,40.13 12.03,40.13 | v5.69,37.46 11.91,37.46 12.04,37.59 12.04,40 TVS8.A 13,40.07 13,40.13
  Bottom 0.406: v35.92,44.32 20.8,44.32 20.04,43.56 15.85,43.56 v13.69,41.4 | v5.69,37.46 5.44,37.21 5.44,18.16 5.61,17.98 ADC_SEN3.2
I2C1_SCL  (via drill 0.5 pad 0.25, 0.6)
  Top 0.254: U1.58 62.51,44.02 62.56,44.07 66.59,44.07 67.13,43.52 v67.13,39.59
  Top 0.406: v53.08,72.41 54.84,72.41 57.94,74.8 82.7,74.8 v83.06,74.71 | v83.06,48.45 82.52,47.92 80.31,47.92 80.15,47.75 80.15,39.34 | 80.15,39.34 v80.1,39.29 | 80.15,39.34 80.15,35.56 v80.77,34.94 | v91.78,31.38 91.78,29.41 | 91.78,29.41 91.78,29.34 TVS12.A | R9.1 75.69,26.95 v76.35,26.95 | v87.27,26.65 87.67,27.05 87.67,29.21 87.74,29.41 91.78,29.41
  Bottom 0.406: JP1.4 53.01,72.48 v53.08,72.41 | v83.06,74.71 v83.06,48.45 | v80.1,39.29 67.42,39.29 v67.13,39.59 | v80.77,34.94 83.66,34.94 84.96,33.64 85.49,33.5 90.19,33.51 90.57,32.55 90.61,32.52 v91.78,31.38 | v76.35,26.95 76.64,26.66 85.14,26.66 85.15,26.65 v87.27,26.65
I2C1_SDA  (via drill 0.6)
  Top 0.254: U1.59 62.42,44.52 | 62.42,44.52 62.43,44.54 | 62.42,44.52 65.77,44.52 65.85,44.6 65.88,44.6 v66.37,45.08
  Top 0.406: R12.1 67.5,20.49 v69.08,18.91 | v89.89,19.19 89.89,22.29 TVS11.A | v88.46,45.73 v100.58,45.73 | v107.76,48.67 107.79,48.7 111.61,48.7 113.33,46.98 v115.76,46.98 | v93.89,9.02 v93.89,14.42
  Bottom 0.254: v66.37,45.08 66.37,45.12 66.81,45.56
  Bottom 0.406: JP1.3 48.25,75.13 48.28,76.12 84,76.12 83.91,74.99 84,74.97 84,45.62 | 66.81,45.56 83.95,45.56 84,45.62 | v69.08,18.91 89.61,18.91 v89.89,19.19 89.89,18.42 v93.89,14.42 | 84,45.62 84.11,45.73 v88.46,45.73 | v100.58,45.73 103.53,48.67 v107.76,48.67 | v115.76,46.98 115.8,46.94 115.8,5.05 115.18,4.43 101.98,4.43 101.98,4.42 95.42,4.42 93.89,5.96 v93.89,9.02
N$1  (via drill 0.5 pad 0.25)
  Top 0.254: U1.31 50.24,40.02 51.1,40.89 v52.37,40.89
  Top 0.406: v51.16,24.84 48.01,24.84 47.98,24.86 47.98,26.88 C1.1
  Bottom 0.406: v52.37,40.89 52.37,37.26 51.49,36.37 51.49,25.17 v51.16,24.84
N$2  (via drill 0.6)
  Top 0.254: U1.47 57.85,35.66 58.17,35.35 v58.8,35.35 | v59.94,27.16 v59.93,27.18 C2.1
  Bottom 0.254: v58.8,35.35 59.94,34.21 v59.94,27.16
N$3  (via drill 0.5 pad 0.25)
  Top 0.254: U1.4 56.85,52.68 56.87,52.7 57.38,52.7 v58.01,53.21
  Top 0.406: v60.93,59.81 v57.89,59.81 | v61.95,72.38 63.86,72.38 G2.C
  Bottom 0.406: v58.01,53.21 60.93,56.26 v60.93,59.81 | v57.89,59.81 57.89,63.88 57.76,64 57.76,64.76 55.6,66.92 55.6,72.51 61.82,72.51 v61.95,72.38
N$4
  Top 1.422: HSMS-2824-BLKG.1 19.56,50.06 17.86,51.76 17.86,73.76 TO_BATTERY.3
N$5  (via drill 0.6)
  Top 0.406: C4.1 55.8,66.2 R1.1 57.56,65.05 v58.37,65.86 | v72.67,65.88 72.67,67.19 70.91,67.19 406C35E.3
  Bottom 0.406: v58.37,65.86 72.66,65.86 v72.67,65.88
N$6  (via drill 0.6 pad 0.25)
  Top 0.406: BOOT0.4 BOOT0.3 108.57,13.42 108.61,13.46 117.05,13.46 v117.24,13.26 | v117.19,41.25 106.89,41.25 v106.75,41.11 | v103.73,38.23 103.73,36.69 R2.1
  Bottom 0.406: v117.24,13.26 117.24,41.19 v117.19,41.25 | v106.75,41.11 106.62,41.11 v103.73,38.23
N$9  (via drill 0.6)
  Top 0.254: U1.6 55.85,52.34 55.86,52.35 55.86,53.8 v56.92,54.87
  Top 0.406: v58.95,63.13 55.82,63.13 R1.2
  Bottom 0.406: v56.92,54.87 56.95,54.87 58.95,56.87 v58.95,63.13
N$10  (via drill 0.5 pad 0.25, 0.6)
  Top 0.406: TPS73233DBVT.4 | TPS73233DBVT.4 v88.52,36.37 | v79.04,36.32 79.1,36.39 79.1,53.1 77.23,54.97 v77.23,55.39 | v61.74,55.39 61.67,55.32 58.34,55.32 57.12,56.53 56.98,56.53 55.23,56.56 v54.16,56.44 | v41.22,56.39 41.23,54.35 C14.1
  Bottom 0.406: v88.52,36.37 88.55,36.32 v79.04,36.32 | v77.23,55.39 v61.74,55.39 | v54.16,56.44 53.57,56.39 50.72,56.39 49.83,56.39 v41.22,56.39
N$13  (via drill 0.5 pad 0.25)
  Top 0.254: U1.62 63.15,46.02 64.87,48
  Top 0.406: 64.87,48 66.9,48 67.03,48.13 v67.03,50.03 | v73.51,50.16 73.51,70.3 RED1.C
  Bottom 0.406: v67.03,50.03 73.38,50.03 v73.51,50.16
N$14  (via drill 0.5 pad 0.25, 0.6)
  Top 0.406: R21.1 51.45,29.01 v53.41,29.01 | v75.76,11.58 76.3,12.13 v76.3,13.86 | v76.25,17.63 76.24,17.64 v76.24,20.41 | v80.37,20.62 80.56,20.43 R22.2 | U2.CD2 U2.CD1 102.57,66.43 v102.59,66.42
  Bottom 0.406: v53.41,29.01 55.48,26.95 55.48,18.61 62.12,11.96 63.74,11.96 64.12,11.58 v75.76,11.58 | v76.3,13.86 76.25,13.9 v76.25,17.63 | v76.24,20.41 76.44,20.62 v80.37,20.62 80.37,23.24 80.49,23.36 114.02,23.36 114.27,23.62 114.27,61.08 107.54,60.95 107.54,63.62 105.64,65.53 102.59,65.53 v102.59,66.42
N$15
  Top 0.406: D2.C 22.1,44.17 21.95,44.32 23.86,44.32 R23.1
N$16  (via drill 0.5 pad 0.25)
  Top 0.406: RED.A 70.36,68.93 70.46,68.83 68.68,68.83 68.68,58.8 v68.94,58.54 | v79.48,58.54 81.51,58.54 R29.1
  Bottom 0.406: v68.94,58.54 v79.48,58.54
N$17  (via drill 0.5 pad 0.25)
  Top 0.406: R28.2 81.56,66.61 v81.51,66.67 | v63.98,66.92 G2.A
  Bottom 0.406: v81.51,66.67 64.24,66.67 v63.98,66.92
N$18
  Top 0.406: R30.1 75.31,72.11 74.9,72.51 73.49,72.51 RED1.A
N$20  (via drill 0.5 pad 0.25)
  Top 0.254: U1.61 63.92,45.52 v65.25,46.86
  Top 0.406: v74.4,47.11 v74.4,67.94 | v70.33,73.91 70.33,72.49 RED.C
  Bottom 0.406: v65.25,46.86 74.14,46.86 v74.4,47.11 | v74.4,67.94 74.4,73.78 74.27,73.91 v70.33,73.91
N$21  (via drill 0.5 pad 0.25)
  Top 0.406: TVS13.A 117.44,57.01 117.32,56.89 117.32,59.56 108.05,59.56 108.05,57.64 S1.3 106.49,57.61 v106.4,57.53 | v102.34,56 97.51,56 96.75,55.24 v88.62,55.24 | v30.33,64.26 30.33,59.18 31.34,59.18 | 31.34,59.18 31.6,59.18 31.72,59.05 | HSMS-2824-BLKG.3 31.75,58.77 31.34,59.18
  Bottom 0.406: v106.4,57.53 106.4,57.02 105.38,56 v102.34,56 | v88.62,55.24 88.62,76.45 87.99,77.08 43.15,77.08 v30.33,64.26
N$26  (via drill 0.5 pad 0.25)
  Top 0.406: T1.1 66.47,16.3 v68.8,16.3 | v72.03,14.89 77.97,14.89 79.09,13.01 R11.1 80.33,7.78 v80.37,7.74 | R19.1 R20.1 92.62,70.61 | 92.62,70.61 R24.1 R25.1 87.35,64.26 v87.22,64.13 | U2.4 102.39,70.02 v102.34,69.97 | v97.76,69.97 95.86,69.97 95.22,70.61 92.62,70.61 | v87.22,47.11 v87.22,38.48 | v93.57,38.6 v93.57,33.52 | v93.57,29.59 93.57,20.44 v90.91,20.44 | v88.49,20.44 85.03,20.44 R22.1 85.06,20.39 v85.06,7.87
  Bottom 0.406: v68.8,16.3 v72.03,14.89 | v102.34,69.97 v97.76,69.97 | v87.22,64.13 v87.22,47.11 | v87.22,38.48 93.45,38.48 v93.57,38.6 | v93.57,33.52 v93.57,29.59 | v90.91,20.44 v88.49,20.44 | v80.37,7.74 84.94,7.74 v85.06,7.87
N$373  (via drill 0.5)
  other vias: 32.11,14.22
N$378  (via drill 0.5)
  other vias: 31.85,6.73
OSC_IN  (via drill 0.6)
  Top 0.254: U1.5 56.34,53.34 56.79,53.67 v56.96,53.65 | v59.9,61.28 59.9,62.44 C5.1
  Top 0.406: 406C35E.1 64.62,64.93 64.6,64.95 61.09,64.95 60.8,64.65 60.8,63.34 C5.1
  Bottom 0.406: v56.96,53.65 57.96,54.64 59.9,56.58 v59.9,61.28
PINK  (via drill 0.5 pad 0.25)
  Top 0.254: U1.16 50.85,50.01 50.77,50.08 48.34,50.08 48.31,50.06 48.31,59.79 TVS10.A
  Top 0.406: 48.31,59.79 47.09,59.79 v46.53,60.34
  Bottom 0.406: v46.53,60.34 8.72,60.34 ADC_SEN2.2
RED  (via drill 0.5 pad 0.25)
  Top 0.254: U1.15 51.35,50.42 51.21,50.57 49,50.57 48.97,50.59 v48.97,52.19
  Top 0.406: TVS9.A 7.24,50.66 v7.24,51.99 7.14,52.09 v4.65,52.09
  Bottom 0.406: v48.97,52.19 8.05,52.19 8.03,52.17 7.42,52.17 v7.24,51.99 | ADC_SEN4.2 5.46,7.49 4.67,8.27 4.67,52.06 v4.65,52.09
RESET  (via drill 0.5 pad 0.25)
  Top 0.254: U1.7 55.35,47.62
  Top 0.406: RESET.4 RESET.3 107.27,21.97 v106.53,21.97 | C6.1 76.07,23.46 77.57,21.97 v88.75,21.97 | 55.35,47.62 v55.35,47.24 | v57.51,47.24 57.51,38.98 59.03,38.98 59.66,38.35 v65.89,38.35 | C6.1 74.61,25.1 v74.65,25.14 | v77.95,25.14 v77.95,38.35 | SWD_DEBUG_PORT.10 47.09,4.82 56.62,4.82 v57.76,5.46 TP4.TP | v73.38,4.82 73.38,12.44 v74.65,13.71 | v74.65,17.65 74.65,23.43 C6.1
  Bottom 0.406: v88.75,21.97 v106.53,21.97 | v55.35,47.24 v57.51,47.24 | v74.65,25.14 v77.95,25.14 | v77.95,38.35 v65.89,38.35 | v57.76,5.46 70.71,5.46 71.35,4.82 v73.38,4.82 | v74.65,13.71 v74.65,17.65
SD_DETECT  (via drill 0.6)
  Top 0.254: U1.25 39.69,43.02 37.9,41.23 32.53,41.23
  Top 0.406: 32.53,41.23 32.5,41.2 v32.5,37.26 | v48.01,36.56 v48.01,36.55 R21.2
  Bottom 0.406: v32.5,37.26 33.2,36.56 v48.01,36.56
SD_EJECT  (via drill 0.6)
  Top 0.254: U1.24 v52.55,43.52 | v111.76,28.15 111.75,28.16
  Top 0.406: 111.75,28.16 TP11.TP 112.38,31.21 EJECT.2 EJECT.1
  Bottom 0.406: v52.55,43.52 59.09,43.52 74.47,28.15 v111.76,28.15
SD_PWR_EN  (via drill 0.6)
  Top 0.254: U1.23 39.48,44.02 37.53,42.06 v33.8,42.06 | v45.33,17.83 v45.33,17.82 R10.2
  Top 0.305: v29.16,27.84 v29.16,23.65
  Top 0.406: T1.3 | T1.3 65.55,14.31 | T1.3 64.26,14.31 59,19.58 48.05,19.58 48.06,19.56 R10.2
  Bottom 0.254: v33.8,42.06 29.14,42.06 29.16,42.04 | v29.16,23.65 v29.17,23.65 | 29.17,17.74 29.17,17.8 29.2,17.83
  Bottom 0.406: 29.16,42.04 v29.16,27.84 | v29.17,23.65 29.17,17.8 | 29.2,17.83 v45.33,17.83
SDIO_CK  (via drill 0.5 pad 0.25)
  Top 0.254: U1.53 62.96,41.52 63.47,42.03 64.24,42.03 64.36,42.16 v66.27,42.16
  Top 0.406: v90.65,42.16 92.05,42.16 94.21,44.32 v98.02,44.32 | v100.56,59.43 100.56,61.46 103.61,61.46 103.61,68.83 103.73,68.96 111.23,68.96 U2.5
  Bottom 0.406: v66.27,42.16 v90.65,42.16 | v98.02,44.32 98.02,54.48 100.56,54.48 v100.56,59.43
SDIO_CMD  (via drill 0.5 pad 0.25, 0.6)
  Top 0.254: v65.53,43.23 65.44,43.33 64.58,43.33 63.89,42.64 63.89,42.61 63.83,42.54 63.31,42.54 62.79,42.02 62.76,42.02 U1.54
  Top 0.406: v98.61,58.82 98.61,62.07 98.65,62.11 v98.65,63.11 | U2.3 v104.87,71.12 102.34,73.65 95.03,73.65 R20.2 | v98.91,71.11 98.91,65.78 v98.65,65.53
  Bottom 0.406: v65.53,43.23 89.82,43.37 89.89,43.44 89.89,58.79 89.85,58.82 v98.61,58.82 | v104.87,71.12 98.92,71.12 v98.91,71.11 | v98.65,65.53 v98.65,63.11
SDIO_D0  (via drill 0.6)
  Top 0.254: U1.39 53.85,35.93 53.75,35.83 v52.51,35.83
  Top 0.406: v52.43,32.97 52.59,32.81 v61.25,32.81 | v76.43,36.81 76.43,29.82 76.47,29.78 v70.46,29.78 v70.45,29.79 v70.46,29.78 70.46,22.73 72.24,20.95 72.24,20.7 72.49,20.44 72.49,16.38 79.22,16.38 79.35,16.25 79.35,15.23 79.48,15.11 82.02,15.11 82.02,12.95 82.07,13.01 R11.2 | v98.18,37.53 99.64,38.99 99.64,42.33 99.67,42.36 99.67,43.05 101.19,44.57 103.73,44.57 104.5,45.33 104.5,65.02 106.2,66.72 U2.7
  Bottom 0.254: v52.51,35.83 52.43,35.75 v52.43,32.97
  Bottom 0.406: v61.25,32.81 64.27,29.79 v70.45,29.79 | v76.43,36.81 77.17,37.54 89.62,37.54 89.62,37.53 v98.18,37.53
SDIO_D1  (via drill 0.5 pad 0.25)
  Top 0.254: U1.40 54.35,38.58 54.33,38.6
  Top 0.406: U2.8 106.62,65.62 v105.26,64.26 | v102.21,64.38 94.65,64.38 R25.2 94.46,64.2 94.46,62.61 v84.81,62.61 | 54.33,38.6 v54.33,46.1 | v62.71,46.73 64.62,48.64 v64.62,51.18 | v81.76,51.18 v84.81,51.18
  Bottom 0.406: v105.26,64.26 102.34,64.26 v102.21,64.38 | v54.33,46.1 62.08,46.1 v62.71,46.73 | v64.62,51.18 v81.76,51.18 | v84.81,51.18 v84.81,62.61
SDIO_D2  (via drill 0.5 pad 0.25, 0.6)
  Top 0.254: v63.76,40.51 62.68,40.51 62.67,40.5 62.65,40.52 U1.51
  Top 0.406: v93.62,57.87 93.63,57.88 93.63,61.66 93.57,61.72 v91.03,61.72 | U2.1 110.41,73.32 105.77,77.97 96.49,77.97 | 96.49,77.97 R19.2 | v96.49,79.75 96.49,77.97
  Bottom 0.406: v93.62,57.87 93.67,40.5 71.73,40.52 v63.76,40.51 | v91.03,61.72 91.03,79.62 90.78,79.88 96.37,79.88 v96.49,79.75
SDIO_D3  (via drill 0.5 pad 0.25, 0.6)
  Top 0.254: v64.8,41.34 64.48,41.4 64.46,41.38 63.76,41.38 63.74,41.4 63.5,41.4 63.16,41.06 62.67,41.06 62.63,41.02 U1.52
  Top 0.406: v91.71,56.3 96.12,56.31 96.03,56.39 96.03,62.43 v95.99,62.48 | v95.86,67.05 95.86,68.57 95.73,68.7 R24.2 | U2.2 104.91,72.22 102.46,74.67 v96.88,74.67
  Bottom 0.406: v91.71,56.3 91.77,41.42 91.7,41.35 64.9,41.35 v64.8,41.34 | v95.99,62.48 95.99,66.92 v95.86,67.05 96.88,68.07 v96.88,74.67
SWCK  (via drill 0.5 pad 0.25)
  Top 0.254: U1.49 61.92,39.52 v62.2,39.24
  Top 0.406: v67.92,33.65 67.92,30.6 63.35,30.6 v62.97,29.71 | v62.84,25.65 v60.55,25.65 | v60.55,16.12 v60.55,0.88 60.55,1.14 TP3.TP | SWD_DEBUG_PORT.4 v50.9,0.88
  Bottom 0.406: v62.2,39.24 62.33,39.24 v67.92,33.65 | v62.97,29.71 v62.84,25.65 | v60.55,25.65 v60.55,16.12 | v60.55,0.88 v50.9,0.88
SWDIO  (via drill 0.5 pad 0.25)
  Top 0.254: U1.46 57.35,35.08 v58.27,34.16
  Top 0.406: v61.57,3.42 R6.1 | v59.03,16.63 v59.03,3.72 | SWD_DEBUG_PORT.2 52.17,0.63 58.78,0.63 v58.78,2.03 58.78,2.28 TP1.TP
  Bottom 0.406: 58.78,3.47 61.53,3.47 v61.57,3.42 | v58.27,34.16 59.03,33.4 v59.03,16.63 | v59.03,3.72 58.78,3.47 | v58.78,2.03 58.78,3.47
TRACESWO  (via drill 0.5 pad 0.25)
  Top 0.254: U1.55 58.88,42.52 v58.78,42.41
  Top 0.406: v41.38,37.71 v41.38,21.97 | v41.38,19.04 v41.38,3.42 TP5.TP | SWD_DEBUG_PORT.6 49.63,0.63 46.08,0.63 v46.08,1.01
  Bottom 0.406: v58.78,42.41 52.55,42.41 47.85,37.71 v41.38,37.71 | v41.38,21.97 v41.38,19.04 | v41.38,3.42 46.08,3.42 | 46.08,3.42 46.12,3.42 | v46.08,1.01 46.08,3.42
USB/FS_OVERCURRENT  (via drill 0.6)
  Top 0.254: v54.87,52.28 54.87,51.64 54.84,51.61 54.84,50.41 54.71,50.29 54.2,50.29 53.85,49.93 U1.10 | v68.71,28.89 65.04,28.95
  Top 0.406: TP2.TP R16.1 82.11,24.34 v82.14,25.88 | CURRENT_LIMITER.3 64.83,28.66 65.04,28.95 | v68.54,48.86 68.83,48.57 68.83,29.01 v68.71,28.89
  Bottom 0.254: v54.87,52.28 54.92,52.33
  Bottom 0.406: 54.92,52.33 59.13,52.33 62.6,48.86 v68.54,48.86 | v82.14,25.88 82.06,26.02 69.84,26.02 69.84,27.31 v68.71,28.89
USB/FS_POWERSWITCHON  (via drill 0.5 pad 0.25)
  Top 0.254: U1.28 39.85,41.52 34.01,35.68
  Top 0.406: CURRENT_LIMITER.1 67.9,27.15 v67.92,27.17 | v62.84,23.87 v46.2,23.87 | v39.34,23.87 39.34,32.51 v35.43,32.51 | 34.01,35.68 28.42,35.68 27.41,34.67 | 27.41,34.67 25.75,34.67 R15.1 | v32.74,33.4 27.41,33.4 27.41,34.67
  Bottom 0.406: v67.92,27.17 67.92,25.65 64.11,25.65 63.98,25.78 63.98,25.01 v62.84,23.87 | v46.2,23.87 v39.34,23.87 | v35.43,32.51 33.63,32.51 v32.74,33.4
VBAT  (via drill 0.6)
  Top 0.254: U1.1 v58.36,51.05
  Top 0.406: v16.28,48.75 16.2,48.67 v16.2,42.18 | v25.82,42.14 25.77,42.19 R23.2 25.77,45.77 25.69,45.84 17.26,45.84 17.15,45.74 17.15,41.24 v17.12,41.2 | v22.38,25.77 26.55,25.77 SUPERCAP.+
  Bottom 0.254: v58.36,51.05 57.68,51.27 46.81,51.25
  Bottom 0.406: 46.81,51.25 45.4,48.72 v16.28,48.75 | v16.2,42.18 16.24,42.14 v25.82,42.14 | v17.12,41.2 18.67,41.13 18.68,32.71 22.36,32.67 v22.38,25.77
VBUS/FS  (via drill 0.5 pad 0.25, 0.6)
  Top 0.254: U1.42 55.35,35.46 | 55.35,35.46 54.14,34.26 v50.25,34.26 | 55.35,35.46 56.6,34.22 v56.63,34.22
  Top 0.406: v39.08,34.26 39.16,34.05 v39.16,37.43 | v32.68,46.67 32.7,46.69 HSMS-2824-BLKG.2 32.7,59.43 | v58.14,29.02 58.43,28.73 v60.99,28.73 | v66.35,22.66 66.73,23.03 | 66.73,23.03 CURRENT_LIMITER.5 65.97,24.55 65.76,24.76 65.76,27.14 CURRENT_LIMITER.2 | RCLAMP0504S.5 v44.81,59.3 | 32.7,59.43 32.7,61.42 32.74,61.46 32.74,63.49 31.85,64.38 31.85,69.8 USB_FS.1 | v33.38,59.3 32.83,59.3 32.7,59.43 | C16.1 101.1,10.12 101.09,10.13 101.09,6.19 100.84,5.94 90.65,5.94 v90.63,5.96 | v70.69,6.73 70.69,17.01 70.64,17.24 70.64,21.43 69.09,22.98 66.78,22.98 66.73,23.03
  Bottom 0.406: v50.25,34.26 v39.08,34.26 | v39.16,37.43 38.73,39 38.73,46.34 38.4,46.67 v32.68,46.67 | v56.63,34.22 58.14,32.71 v58.14,29.02 | v60.99,28.73 61.31,28.41 61.31,24.28 61.32,24.27 61.32,23.19 61.85,22.66 v66.35,22.66 | v44.81,59.3 v33.38,59.3 | v90.63,5.96 71.45,5.96 v70.69,6.73
VIN  (via drill 0.5 pad 0.25)
  Top 0.305: TPS73233DBVT.3 88.55,32.96 88.49,33.01 86.72,33.01 86.72,31.87 TPS73233DBVT.1
  Top 0.406: TPS73233DBVT.3 90.54,31.81 91.15,32.41 96.88,32.41 | 96.88,32.41 97.28,32.41 97.88,31.82 100.62,31.82 C15.1 | S1.2 v106.65,55.11 | v98.65,43.17 98.65,39.75 96.49,37.59 96.49,32.79 96.88,32.41
  Bottom 0.406: v106.65,55.11 106.65,54.99 105.38,53.72 98.91,53.72 98.78,53.59 98.78,43.3 v98.65,43.17

## Text on the board
tNames: Open Sensor Platform Main Board V.1 | SDA | GND | VCC | SCL | GND | BLUE | VCC | GND | PINK | VCC | GND | GREEN | VCC | GND | RED | VCC | Colten Nye, Steve Peirce, Golriz Sedaghat